# Altium PCB LKS_DEMO_V5.0.PcbDoc (part 2 of 4)
Units mil, origin at the board's own origin, x right, y up, seen from the top; angles counter-clockwise.
Board outline 5414.8 x 3354.56 mil, 2 copper layers (Top Layer, Bottom Layer); 131 components, 85 nets, 355 pads, 272 vias.
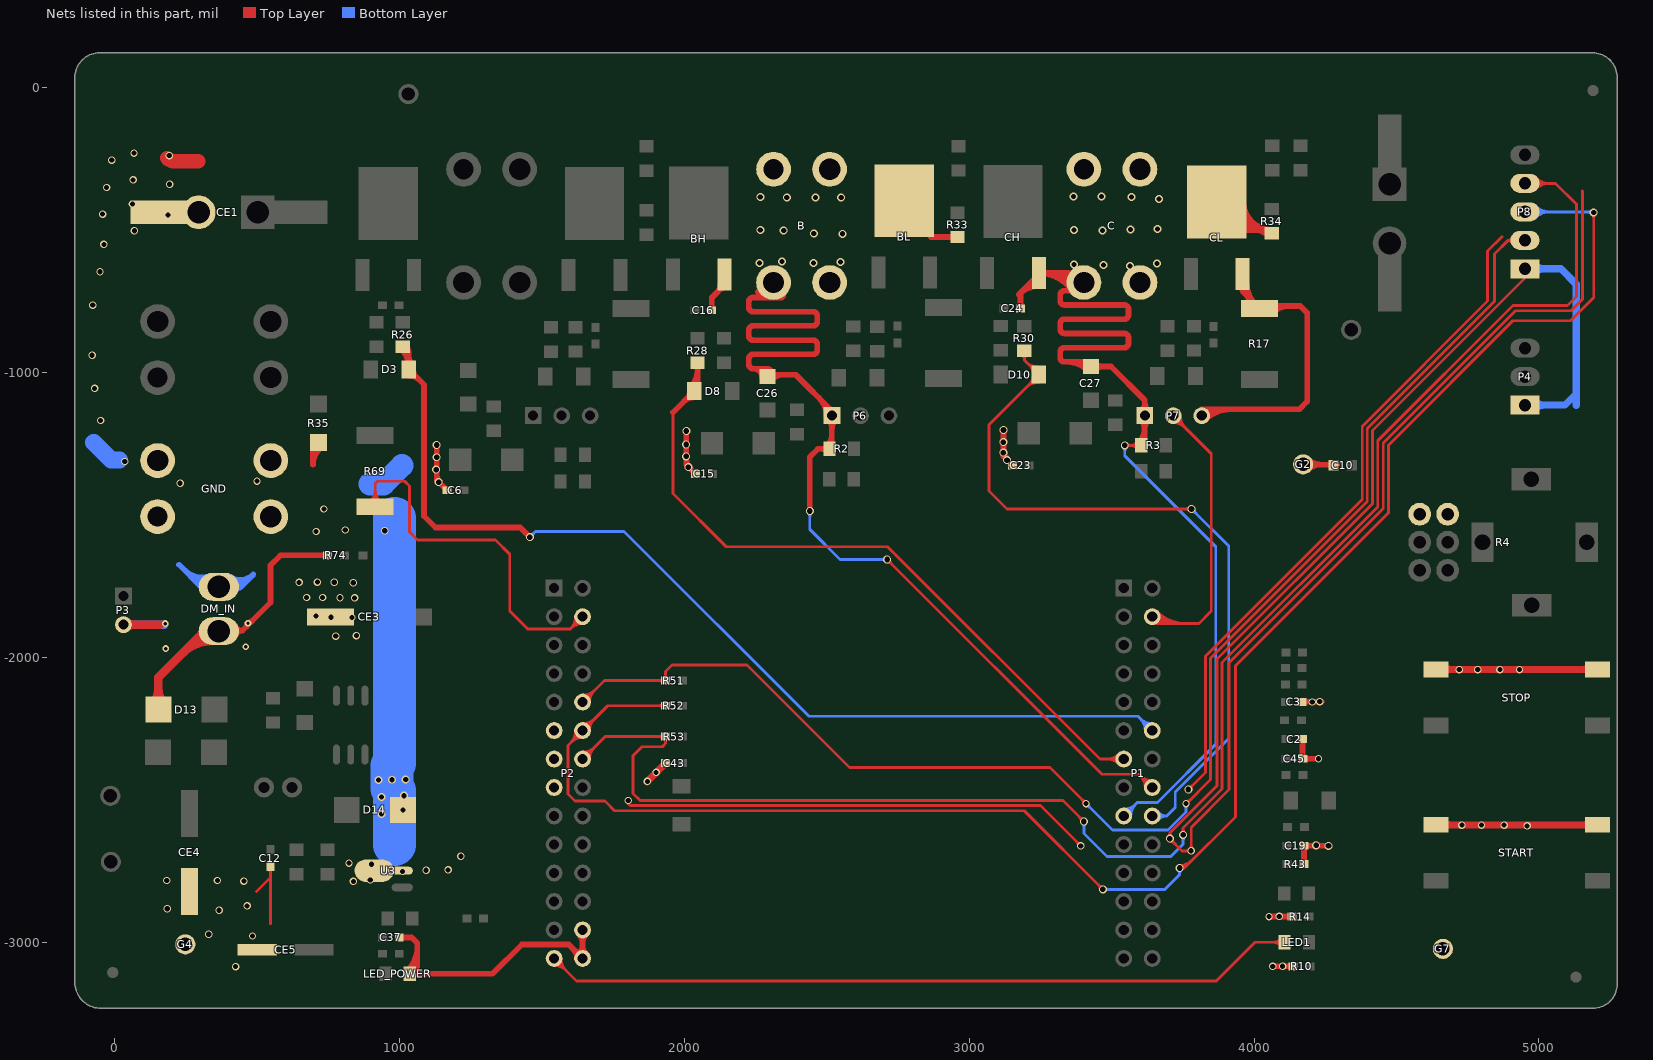
[diagram p2: the nets of this part, all layers, seen from the top]

## Via types
v1: diameter 26, hole 18, Top Layer to Bottom Layer, 117 vias
v2: diameter 28, hole 20, Top Layer to Bottom Layer, 77 vias
v3: diameter 28, hole 18, Top Layer to Bottom Layer, 73 vias
v4: diameter 23.62, hole 11.81, Top Layer to Bottom Layer, 5 vias

## Nets (pads, with @x,y where several pads share a name; then routed paths per layer and width w, separated by ;. In a path a pad name is that pad's centre, name@x,y a point inside that pad or via, vN(x,y) a via of type N, cw(c..) or ccw(c..) an arc to the next point about the centre after c; other vN are vias at no path point) (continued)
BX: B.1 BH.3 BL.2 C16.2 C26.2 P1.22 P6.1 R2.2 R33.2 | length 5651.7
  Top Layer w10: v2(2711.53,-1656.28) 3465.28,-2410.04 3595.47,-2410.04 P1.22@3642.25,-2456.82 ; 2726.89,-1671.64 ccw(c2711.53,-1687.01) 2711.53,-1665.28 cw(c2711.53,-1687.01) 2726.89,-1671.64 ; 2726.89,-1671.64 cw(c2742.25,-1656.28) 2720.53,-1656.28 ccw(c2742.25,-1656.28) 2726.89,-1671.64 ; 3600.38,-2414.94 ccw(c3642.25,-2373.07) 3642.25,-2432.29 cw(c3642.25,-2373.07) 3600.38,-2414.94 ; 3600.38,-2414.94 cw(c3558.51,-2456.82) 3617.72,-2456.82 ccw(c3558.51,-2456.82) 3600.38,-2414.94 ; 3617.45,-2432.02 ccw(c3642.25,-2407.22) 3642.25,-2442.29 cw(c3642.25,-2407.22) 3617.45,-2432.02 ; 3617.45,-2432.02 cw(c3592.65,-2456.82) 3627.72,-2456.82 ccw(c3592.65,-2456.82) 3617.45,-2432.02
  Top Layer w20: C16.2@2095.76,-779.93 2095.76,-737.17 BH.3@2142.44,-690.49 ; 2256.72,-716.82 2275.97,-736.07 ; C26.2@2283.73,-1030.78 2306.96,-1007.55 2390.76,-1007.55 2517.75,-1134.54 P6.1@2517.75,-1146.43 ; C26.2@2292.27,-1001.77 2276.58,-986.07 2240.96,-986.07 ; B.1@2345.96,-729.82 cw(c2339.71,-729.82) 2339.71,-736.07 2275.97,-736.07 ; v2(2439.84,-1486.25) 2439.84,-1296.61 2468.64,-1267.81 R2.2@2509.31,-1267.81 ; R2.2@2517.24,-1252.66 P6.1@2517.24,-1145.92 ; BL.2@2818.05,-476.55 2865.7,-524.2 R33.2@2958.78,-524.2 ; 2240.96,-986.07 cw(c2240.96,-971.07) 2225.96,-971.07 2225.96,-951.07 cw(c2240.96,-951.07) 2240.96,-936.07 2450.96,-936.07 ccw(c2450.96,-921.07) 2465.96,-921.07 2465.96,-901.07 ccw(c2450.96,-901.07) 2450.96,-886.07 2240.96,-886.07 cw(c2240.96,-871.07) 2225.96,-871.07 2225.96,-851.07 cw(c2240.96,-851.07) 2240.96,-836.07 2450.96,-836.07 ccw(c2450.96,-821.07) 2465.96,-821.07 2465.96,-801.07 ccw(c2450.96,-801.07) 2450.96,-786.07 2240.96,-786.07 cw(c2240.96,-771.07) 2225.96,-771.07 2225.96,-751.07 cw(c2240.96,-751.07) 2240.96,-736.07 2275.97,-736.07 ; 2240.96,-986.07 cw(c2240.96,-1018.55) 2273.27,-1015.24 ccw(c2240.96,-1018.55) 2240.96,-986.07 ; 2481.18,-1267.81 ccw(c2481.18,-1239.68) 2501.07,-1259.57 cw(c2481.18,-1239.68) 2481.18,-1267.81 ; 2481.18,-1267.81 cw(c2481.18,-1295.95) 2501.07,-1276.05 ccw(c2481.18,-1295.95) 2481.18,-1267.81 ; 2927.3,-524.2 ccw(c2927.3,-496.07) 2947.2,-515.96 cw(c2927.3,-496.07) 2927.3,-524.2 ; 2927.3,-524.2 cw(c2927.3,-552.33) 2947.2,-532.44 ccw(c2927.3,-552.33) 2927.3,-524.2 ; 2112.38,-720.55 ccw(c2079.48,-687.65) 2126.01,-687.65 cw(c2079.48,-687.65) 2112.38,-720.55 ; BH.3@2123.65,-709.29 cw(c2140.62,-726.26) 2140.62,-702.26 ccw(c2140.62,-726.26) BH.3@2123.65,-709.29 ; 2263.12,-986.07 cw(c2263.12,-1016.28) 2293.17,-1013.2 ccw(c2263.12,-1016.28) 2263.12,-986.07 ; 2285.27,-986.07 cw(c2285.27,-1014.01) 2313.06,-1011.16 ccw(c2285.27,-1014.01) 2285.27,-986.07 ; C26.2@2305.42,-1025.27 cw(c2348.2,-1068.06) 2348.2,-1007.55 ccw(c2348.2,-1068.06) C26.2@2305.42,-1025.27 ; 2472.61,-1089.39 cw(c2410.76,-1151.24) 2498.22,-1151.24 ccw(c2410.76,-1151.24) 2472.61,-1089.39 ; R2.2@2501.07,-1256.23 ccw(c2462.03,-1217.19) 2517.24,-1217.19 cw(c2462.03,-1217.19) R2.2@2501.07,-1256.23 ; P6.1@2503.94,-1165.05 cw(c2471.83,-1197.16) 2517.24,-1197.16 ccw(c2471.83,-1197.16) P6.1@2503.94,-1165.05 ; P6.1@2506.75,-1123.54 cw(c2479.05,-1151.24) 2518.22,-1151.24 ccw(c2479.05,-1151.24) P6.1@2506.75,-1123.54 ; 2517.24,-1199.61 cw(c2566.12,-1199.61) 2531.56,-1165.05 ccw(c2566.12,-1199.61) 2517.24,-1199.61
  Top Layer w30: BL.2@2771.14,-396.91 BL.2@2843.26,-324.79
  Bottom Layer w10: v2(2439.84,-1486.25) 2439.84,-1549.97 2546.15,-1656.28 v2(2711.53,-1656.28) ; 2439.84,-1507.98 ccw(c2418.11,-1507.98) 2433.48,-1492.61 cw(c2418.11,-1507.98) 2439.84,-1507.98 ; 2439.84,-1507.98 cw(c2461.57,-1507.98) 2446.2,-1492.61 ccw(c2461.57,-1507.98) 2439.84,-1507.98 ; 2689.8,-1656.28 ccw(c2689.8,-1634.55) 2705.16,-1649.92 cw(c2689.8,-1634.55) 2689.8,-1656.28 ; 2689.8,-1656.28 cw(c2689.8,-1678.01) 2705.16,-1662.64 ccw(c2689.8,-1678.01) 2689.8,-1656.28
  other v3: 2453.04,-615.74 2262.77,-614.91 2548.36,-611.49 2341.84,-609.97 2554.35,-512.78 2453.86,-511.13 2348.43,-501.25 2266.06,-499.6 2359.14,-385.93 2459.63,-385.11 2550.23,-385.11 2266.06,-383.46
CI: CL.3 P7.3 R17.1 | length 1960.4
  Top Layer w20: P7.3@3816.05,-1129.25 4158.12,-1129.25 4185.85,-1101.52 4185.85,-790.19 4161.78,-766.12 R17.1@4035,-766.12 ; CL.3@3959.59,-653.34 3959.59,-714.63 ; R17.1@4018.89,-773.93 3959.59,-714.63 ; CL.3@3950.65,-696.38 cw(c3936.51,-714.63) 3959.59,-714.63 ; CL.3@3950.65,-696.38 cw(c3936.51,-714.63) 3959.59,-714.63 ; CL.3@3950.65,-696.38 cw(c3936.51,-714.63) 3959.59,-714.63 ; CL.3@3950.65,-696.38 cw(c3936.51,-714.63) 3959.59,-714.63 ; 3959.59,-714.63 cw(c3982.67,-714.63) CL.3@3968.54,-696.38 ; 3959.59,-714.63 cw(c3982.67,-714.63) CL.3@3968.54,-696.38 ; 3959.59,-714.63 cw(c3982.67,-714.63) CL.3@3968.54,-696.38 ; 3959.59,-714.63 cw(c3982.67,-714.63) CL.3@3968.54,-696.38 ; P7.3@3815.72,-1150.9 cw(c3867.98,-1203.17) 3867.98,-1129.25 ccw(c3867.98,-1203.17) P7.3@3815.72,-1150.9 ; P7.3@3829.86,-1165.05 cw(c3916.27,-1251.46) 3916.27,-1129.25 ccw(c3916.27,-1251.46) P7.3@3829.86,-1165.05 ; CL.3@3954.2,-684.73 ccw(c4010.73,-685.8) 3970.75,-725.78 cw(c4010.73,-685.8) CL.3@3954.2,-684.73 ; 3968.31,-723.35 cw(c3927.85,-763.81) 3984.04,-774.61 ccw(c3927.85,-763.81) 3968.31,-723.35 ; CL.3@3974.2,-685.11 ccw(c4075.98,-687.04) 4003.99,-759.03 cw(c4075.98,-687.04) CL.3@3974.2,-685.11 ; R17.1@4068.26,-788.33 cw(c4121.87,-841.94) 4121.87,-766.12 ccw(c4121.87,-841.94) R17.1@4068.26,-788.33
CP: P1.16 P7.2 | length 2028.1
  Top Layer w10: P1.16@3642.25,-1856.82 3666.39,-1880.96 3806.07,-1880.96 3849.41,-1837.62 3849.41,-1284.87 3716.05,-1151.52 P7.2@3716.05,-1129.25 ; P1.16@3631.31,-1867.76 ccw(c3663.18,-1835.89) 3663.18,-1880.96 cw(c3663.18,-1835.89) P1.16@3631.31,-1867.76 ; P1.16@3638.38,-1860.69 ccw(c3687.32,-1811.75) 3687.32,-1880.96 cw(c3687.32,-1811.75) P1.16@3638.38,-1860.69 ; P1.16@3645.45,-1853.61 ccw(c3711.46,-1787.6) 3711.46,-1880.96 cw(c3711.46,-1787.6) P1.16@3645.45,-1853.61 ; P1.16@3652.52,-1846.54 ccw(c3735.6,-1763.46) 3735.6,-1880.96 cw(c3735.6,-1763.46) P1.16@3652.52,-1846.54 ; P1.16@3659.59,-1839.47 ccw(c3759.75,-1739.32) 3759.75,-1880.96 cw(c3759.75,-1739.32) P1.16@3659.59,-1839.47 ; P7.2@3716.05,-1175.77 cw(c3716.05,-1234.31) 3757.45,-1192.91 ccw(c3716.05,-1234.31) P7.2@3716.05,-1175.77 ; P7.2@3716.05,-1165.77 cw(c3716.05,-1200.16) 3740.37,-1175.84 ccw(c3716.05,-1200.16) P7.2@3716.05,-1165.77 ; P7.2@3730.58,-1151.24 ccw(c3766.32,-1151.24) 3741.05,-1176.51 cw(c3766.32,-1151.24) P7.2@3730.58,-1151.24 ; P7.2@3740.58,-1151.24 ccw(c3800.47,-1151.24) 3758.12,-1193.59 cw(c3800.47,-1151.24) P7.2@3740.58,-1151.24
CX: C24.2 C27.2 C.1 CH.3 CL.2 P1.9 P7.1 R3.2 R34.2 | length 7899.2
  Top Layer w10: v2@3545.76,-1255.52 R3.2@3603.88,-1255.52 ; 3563.68,-1255.52 ccw(c3563.68,-1215.31) 3592.11,-1243.74 cw(c3563.68,-1215.31) 3563.68,-1255.52 ; 3563.68,-1255.52 cw(c3563.68,-1295.72) 3592.11,-1267.29 ccw(c3563.68,-1295.72) 3563.68,-1255.52 ; v2@3552.04,-1261.8 cw(c3567.2,-1276.96) 3567.2,-1255.52 ccw(c3567.2,-1276.96) v2@3552.04,-1261.8 ; v2@3552.04,-1249.07 ccw(c3567.6,-1233.51) 3567.6,-1255.52 cw(c3567.6,-1233.51) v2@3552.04,-1249.07
  Top Layer w20: C24.2@3179.62,-774.76 3179.62,-719.71 CH.3@3244.29,-655.03 ; C.1@3407.81,-708.51 3350.03,-650.72 CH.3@3243.88,-650.72 ; C27.2@3427.06,-978.99 3497.71,-978.99 3616.05,-1097.32 P7.1@3616.05,-1151.24 ; C27.2@3431.28,-962.46 3334.05,-962.46 cw(c3334.05,-947.46) 3319.05,-947.46 3319.05,-927.46 cw(c3334.05,-927.46) 3334.05,-912.46 3544.05,-912.46 ccw(c3544.05,-897.46) 3559.05,-897.46 3559.05,-877.46 ccw(c3544.05,-877.46) 3544.05,-862.46 3334.05,-862.46 cw(c3334.05,-847.46) 3319.05,-847.46 3319.05,-827.46 cw(c3334.05,-827.46) 3334.05,-812.46 3544.05,-812.46 ccw(c3544.05,-797.46) 3559.05,-797.46 3559.05,-777.46 ccw(c3544.05,-777.46) 3544.05,-762.46 3334.05,-762.46 cw(c3334.05,-747.46) 3319.05,-747.46 3319.05,-727.46 cw(c3334.05,-727.46) 3334.05,-712.46 3430.58,-712.46 ccw(c3430.58,-704) C.1@3439.04,-704 ; R3.2@3614.91,-1254.73 P7.1@3614.91,-1128.61 ; CL.2@3869.04,-401.37 3967.82,-500.15 R34.2@4064.65,-500.15 ; CH.3@3243.88,-650.72 cw(c3243.89,-790.89) 3360,-712.38 ccw(c3243.89,-790.89) CH.3@3243.88,-650.72 ; 3279.14,-650.72 ccw(c3279.14,-685.99) 3254.21,-661.05 cw(c3279.14,-685.99) 3279.14,-650.72 ; 3279.14,-650.72 cw(c3279.14,-615.46) 3254.21,-640.4 ccw(c3279.14,-615.46) 3279.14,-650.72 ; 3469.04,-978.99 ccw(c3469.04,-1019) 3440.74,-990.71 cw(c3469.04,-1019) 3469.04,-978.99 ; 3469.04,-978.99 cw(c3469.04,-938.97) 3440.74,-967.27 ccw(c3469.04,-938.97) 3469.04,-978.99 ; 3616.05,-1104.09 ccw(c3663.19,-1104.09) 3629.86,-1137.43 cw(c3663.19,-1104.09) 3616.05,-1104.09 ; 3616.05,-1104.09 cw(c3568.91,-1104.09) 3602.24,-1137.43 ccw(c3568.91,-1104.09) 3616.05,-1104.09 ; R34.2@4064.64,-500.15 cw(c4064.64,-396.87) 3962.41,-411.57 ccw(c4064.64,-396.87) R34.2@4064.64,-500.15 ; 3173.24,-726.09 cw(c3243.88,-796.73) 3243.88,-696.83 ccw(c3243.88,-796.73) 3173.24,-726.09 ; 3207.38,-691.95 cw(c3243.88,-728.45) 3243.88,-676.83 ccw(c3243.88,-728.45) 3207.38,-691.95 ; CH.3@3241.52,-657.8 cw(c3243.88,-660.16) 3243.88,-656.83 ccw(c3243.88,-660.16) CH.3@3241.52,-657.8 ; 3281.56,-650.72 cw(c3281.56,-765.42) 3376.57,-701.17 ccw(c3281.56,-765.42) 3281.56,-650.72 ; 3319.22,-650.72 cw(c3319.22,-739.95) 3393.14,-689.97 ccw(c3319.22,-739.95) 3319.22,-650.72 ; 3345.18,-962.46 cw(c3345.18,-1058.9) 3413.37,-990.71 ccw(c3345.18,-1058.9) 3345.18,-962.46 ; 3348.3,-712.46 cw(c3348.3,-737.77) 3366.19,-719.87 ccw(c3348.3,-737.77) 3348.3,-712.46 ; 3393.46,-962.46 cw(c3393.46,-1010.61) 3427.51,-976.57 ccw(c3393.46,-1010.61) 3393.46,-962.46 ; R3.2@3595.64,-1243.93 ccw(c3549.14,-1197.43) 3614.91,-1197.43 cw(c3549.14,-1197.43) R3.2@3595.64,-1243.93 ; P7.1@3602.24,-1165.05 cw(c3571.67,-1195.62) 3614.91,-1195.62 ccw(c3571.67,-1195.62) P7.1@3602.24,-1165.05 ; 3614.91,-1201.15 cw(c3665.96,-1201.15) 3629.86,-1165.05 ccw(c3665.96,-1201.15) 3614.91,-1201.15 ; CL.2@3883.23,-422.95 ccw(c3972.32,-410.14) 3972.32,-500.15 cw(c3972.32,-410.14) CL.2@3883.23,-422.95 ; CL.2@3903.02,-420.1 ccw(c3995.4,-406.82) 3995.4,-500.15 cw(c3995.4,-406.82) CL.2@3903.02,-420.1 ; CL.2@3922.82,-417.26 ccw(c4018.48,-403.5) 4018.48,-500.15 cw(c4018.48,-403.5) CL.2@3922.82,-417.26 ; CL.2@3942.61,-414.41 ccw(c4041.56,-400.18) 4041.56,-500.15 cw(c4041.56,-400.18) CL.2@3942.61,-414.41 ; 4003.57,-500.15 cw(c4003.57,-566.15) 4050.23,-519.48 ccw(c4003.57,-566.15) 4003.57,-500.15
  Bottom Layer w10: P1.9@3542.25,-2556.82 3589.53,-2509.53 3660.12,-2509.53 3865.01,-2304.65 3865.01,-1611.21 3545.66,-1291.87 v2@3545.66,-1255.42 ; 3567.05,-2532.02 ccw(c3591.85,-2556.82) 3556.78,-2556.82 cw(c3591.85,-2556.82) 3567.05,-2532.02 ; 3567.05,-2532.02 cw(c3542.25,-2507.22) 3542.25,-2542.29 ccw(c3542.25,-2507.22) 3567.05,-2532.02 ; 3584.12,-2514.94 ccw(c3625.99,-2556.82) 3566.78,-2556.82 cw(c3625.99,-2556.82) 3584.12,-2514.94 ; 3584.12,-2514.94 cw(c3542.25,-2473.07) 3542.25,-2532.29 ccw(c3542.25,-2473.07) 3584.12,-2514.94 ; v2@3539.31,-1261.8 cw(c3523.97,-1277.14) 3545.66,-1277.14 ccw(c3523.97,-1277.14) v2@3539.31,-1261.8 ; 3545.66,-1277.18 cw(c3567.42,-1277.18) 3552.04,-1261.8 ccw(c3567.42,-1277.18) 3545.66,-1277.18
  other v2: 3545.67,-1255.43
  other v3: 3564.36,-625.82 3471.16,-622.37 3367.61,-620.65 3658.66,-616.83 3467.71,-501.56 3367.61,-499.84 3566.09,-498.11 3661.01,-496.39 3666.19,-391.11 3569.54,-384.21 3365.89,-382.48 3464.26,-382.48
DM_IN: D13.1 DM_IN.1 P3.2 R74.1 | length 2236.4
  Top Layer w20: DM_IN.1@316.98,-1905.81 447.95,-1905.81 ; R74.1@746.62,-1641.8 581.53,-1641.8 546.73,-1676.6 546.73,-1807.04 447.95,-1905.81 ; 447.95,-1905.81 ccw(c447.95,-1932.18) 423.45,-1922.44 cw(c447.95,-1932.18) 447.95,-1905.81 ; 447.95,-1905.81 cw(c447.95,-1876.37) 421.82,-1889.92 ccw(c447.95,-1876.37) 447.95,-1905.81 ; 460.08,-1893.69 ccw(c446.31,-1879.92) 465.78,-1879.92 cw(c446.31,-1879.92) 460.08,-1893.69 ; v4@467.59,-1878.11 ccw(c467.59,-1858.64) 481.36,-1872.41 cw(c467.59,-1858.64) v4@467.59,-1878.11
  Top Layer w30: P3.2@30.28,-1884.94 160,-1884.94 ; D13.1@153,-2182.97 153,-2069.8 DM_IN.1@316.98,-1905.81 ; 65.35,-1884.94 ccw(c65.35,-1920.01) 40.55,-1895.21 cw(c65.35,-1920.01) 65.35,-1884.94 ; 65.35,-1884.94 cw(c65.35,-1849.87) 40.55,-1874.67 ccw(c65.35,-1849.87) 65.35,-1884.94 ; 153,-2109.88 ccw(c226.09,-2109.88) 174.4,-2161.56 cw(c226.09,-2109.88) 153,-2109.88 ; 153,-2109.88 cw(c79.9,-2109.88) 131.59,-2161.56 ccw(c79.9,-2109.88) 153,-2109.88 ; 236,-1986.79 cw(c343.7,-2094.48) 343.7,-1942.18 ccw(c343.7,-2094.48) 236,-1986.79 ; 287.22,-1935.57 cw(c343.7,-1992.05) 343.7,-1912.18 ccw(c343.7,-1992.05) 287.22,-1935.57
  Bottom Layer w30: P3.2@30.28,-1884.94 v4@173.43,-1884.94 ; 65.35,-1884.94 ccw(c65.35,-1920.01) 40.55,-1895.21 cw(c65.35,-1920.01) 65.35,-1884.94 ; 65.35,-1884.94 cw(c65.35,-1849.87) 40.55,-1874.67 ccw(c65.35,-1849.87) 65.35,-1884.94
  other v4: 178.44,-1968.99 459.85,-1962.53 177.15,-1881.21 467.59,-1879.92
GND: C2.1 C3.2 C6.1 C10.2 C12.2 C15.1 C19.1 C23.1 C37.1 C43.1 C45.1 CE1.2 CE3.2 CE4.2 CE5.2 D14.1 DM_IN.2 G2.1 G4.1 G7.1 GND.1 LED_POWER.2 P2.16 P2.27 P2.28 P4.1 P8.1 R4.2 R4.4 R10.2 R14.2 R35.2 R43.1 R69.2 START.1 START.3 STOP.1 STOP.3 U3.2 | length 24932.8
  Top Layer w10: 497.13,-2822.29 546.38,-2773.05 ; 546.38,-2934.9 C12.2@546.38,-2734.12 ; R69.2@914.27,-1470.9 914.27,-1389.58 922.35,-1381.5 1017.63,-1381.5 1034.22,-1398.09 1034.22,-1558.82 1062.7,-1587.3 1336.01,-1587.3 1386.69,-1637.98 1386.69,-1836.74 1449.85,-1899.9 1599.17,-1899.9 P2.16@1642.25,-1856.82 ; v1(1802.37,-2502.34) 1802.37,-2513.52 1809.13,-2520.28 3249.96,-2520.28 v1@3391.58,-2661.9 ; v2(3768.98,-2463.96) 3829.09,-2403.83 3829.09,-1995.77 4379.28,-1445.58 4379.28,-1188.95 4819.78,-748.44 4819.78,-573.14 4870.02,-522.9 ; v1@3776.66,-2679.5 3746.72,-2679.5 v2(3703.71,-2636.48) 3703.7,-2616.34 ; v1@3779.38,-2682.22 3779.38,-2596.62 3911.8,-2464.2 3911.8,-2018.96 4453.19,-1477.57 4453.19,-1247.54 4917.92,-782.81 5112.33,-782.81 5152.47,-742.68 5152.47,-363.2 5151.94,-362.68 ; P8.1@4950.7,-635.64 4950.7,-668.08 4415.03,-1203.76 4415.03,-1460.39 3869.28,-2006.13 3869.28,-2450.75 3703.7,-2616.34 ; 546.38,-2757.28 ccw(c525.18,-2757.28) 540.17,-2742.29 cw(c525.18,-2757.28) 546.38,-2757.28 ; 546.38,-2757.28 cw(c567.57,-2757.28) 552.58,-2742.29 ccw(c567.57,-2757.28) 546.38,-2757.28 ; 914.27,-1435.82 ccw(c949.34,-1435.82) 924.54,-1460.62 cw(c949.34,-1435.82) 914.27,-1435.82 ; 914.27,-1435.82 cw(c879.2,-1435.82) 904,-1460.62 ccw(c879.2,-1435.82) 914.27,-1435.82 ; 914.27,-1411.68 ccw(c973.49,-1411.68) 931.61,-1453.55 cw(c973.49,-1411.68) 914.27,-1411.68 ; 914.27,-1411.68 cw(c855.06,-1411.68) 896.93,-1453.55 ccw(c855.06,-1411.68) 914.27,-1411.68 ; 1600.38,-1898.69 ccw(c1558.51,-1856.82) 1617.72,-1856.82 cw(c1558.51,-1856.82) 1600.38,-1898.69 ; 1600.38,-1898.69 cw(c1642.25,-1940.56) 1642.25,-1881.34 ccw(c1642.25,-1940.56) 1600.38,-1898.69 ; 1617.45,-1881.62 ccw(c1592.65,-1856.82) 1627.72,-1856.82 cw(c1592.65,-1856.82) 1617.45,-1881.62 ; 1617.45,-1881.62 cw(c1642.25,-1906.42) 1642.25,-1871.34 ccw(c1642.25,-1906.42) 1617.45,-1881.62 ; 3703.7,-2616.34 ccw(c3721.72,-2616.34) 3709.71,-2629.78 cw(c3721.72,-2616.34) 3703.7,-2616.34 ; 3703.7,-2616.34 cw(c3685.64,-2616.34) 3697.7,-2629.78 ccw(c3685.64,-2616.34) 3703.7,-2616.34 ; 3719.07,-2651.85 ccw(c3703.71,-2667.21) 3703.71,-2645.48 cw(c3703.71,-2667.21) 3719.07,-2651.85 ; 3719.07,-2651.85 cw(c3734.43,-2636.48) 3712.71,-2636.48 ccw(c3734.43,-2636.48) 3719.07,-2651.85 ; v1@3773.01,-2673.08 cw(c3757.51,-2657.58) 3757.51,-2679.5 ccw(c3757.51,-2657.58) v1@3773.01,-2673.08 ; v1@3773.01,-2673.08 ccw(c3757.64,-2657.71) 3779.38,-2657.71 cw(c3757.64,-2657.71) v1@3773.01,-2673.08 ; 3376.88,-2647.21 cw(c3362.19,-2661.9) 3382.97,-2661.9 ccw(c3362.19,-2661.9) 3376.88,-2647.21 ; 3378.36,-2648.68 ccw(c3390.97,-2636.06) 3390.97,-2653.9 cw(c3390.97,-2636.06) 3378.36,-2648.68 ; 3761.2,-2679.5 cw(c3761.2,-2696.21) 3773.01,-2684.39 ccw(c3761.2,-2696.21) 3761.2,-2679.5 ; v2@3768.98,-2454.96 ccw(c3768.98,-2433.27) 3784.32,-2448.6 cw(c3768.98,-2433.27) v2@3768.98,-2454.96 ; v2@3777.98,-2463.96 cw(c3799.75,-2463.96) 3784.36,-2448.56 ccw(c3799.75,-2463.96) v2@3777.98,-2463.96 ; 3779.38,-2661.14 ccw(c3796.27,-2661.14) 3784.33,-2673.08 cw(c3796.27,-2661.14) 3779.38,-2661.14
  Top Layer w20: 695.87,-1320.57 695.87,-1264.91 R35.2@715.63,-1245.14 ; C37.1@998.61,-2983.24 1042.18,-2983.24 1061.93,-3002.99 1061.93,-3084.89 LED_POWER.2@1036.01,-3110.82 1326.22,-3110.82 1429.02,-3008.01 1593.45,-3008.01 P2.28@1642.25,-3056.82 P2.27@1642.25,-2956.82 ; v2(1129.78,-1254.51) 1129.77,-1376.63 C6.1@1166.15,-1413.01 ; v2@2006.32,-1205.37 2006.32,-1322.72 C15.1@2039.42,-1355.82 ; v2(3120.2,-1201.76) 3120.19,-1294.77 C23.1@3151.34,-1325.92 ; v1(4052.23,-2909.82) R14.2@4132.95,-2909.82 ; v1(4065.25,-3084.6) R10.2@4136.85,-3084.6 ; C3.2@4168.4,-2156.04 v1@4236.85,-2156.04 ; C45.1@4170.04,-2355.01 C2.1@4170.04,-2286.71 ; C45.1@4170.76,-2355.72 v1(4225.95,-2355.72) ; G2.1@4171.95,-1322.36 4172.91,-1323.32 C10.2@4291.96,-1323.32 ; R43.1@4174.8,-2725.21 C19.1@4174.8,-2661.32 v2(4260.7,-2661.32) ; R35.2@715.63,-1245.14 ccw(c743.75,-1283.9) 695.87,-1283.9 cw(c743.75,-1283.9) R35.2@715.63,-1245.14 ; 1064.14,-3110.82 ccw(c1064.14,-3138.95) 1044.25,-3119.06 cw(c1064.14,-3138.95) 1064.14,-3110.82 ; 1064.14,-3110.82 cw(c1064.14,-3082.68) 1044.25,-3102.58 ccw(c1064.14,-3082.68) 1064.14,-3110.82 ; 1608.91,-3023.48 ccw(c1642.25,-2990.14) 1642.25,-3037.29 cw(c1642.25,-2990.14) 1608.91,-3023.48 ; 1608.91,-3023.48 cw(c1575.58,-3056.82) 1622.72,-3056.82 ccw(c1575.58,-3056.82) 1608.91,-3023.48 ; 1642.25,-3009.67 ccw(c1689.39,-3009.67) 1656.06,-3043.01 cw(c1689.39,-3009.67) 1642.25,-3009.67 ; 1642.25,-3009.67 cw(c1595.11,-3009.67) 1628.44,-3043.01 ccw(c1595.11,-3009.67) 1642.25,-3009.67 ; 1642.25,-3003.96 ccw(c1595.11,-3003.96) 1628.44,-2970.62 cw(c1595.11,-3003.96) 1642.25,-3003.96 ; 1642.25,-3003.96 cw(c1689.39,-3003.96) 1656.06,-2970.62 ccw(c1689.39,-3003.96) 1642.25,-3003.96 ; 695.87,-1323.12 cw(c772.21,-1323.12) 727.38,-1261.33 ccw(c772.21,-1323.12) 695.87,-1323.12 ; LED_POWER.2@1027.77,-3099.23 ccw(c945.28,-3016.75) 1061.93,-3016.75 cw(c945.28,-3016.75) LED_POWER.2@1027.77,-3099.23 ; LED_POWER.2@1036.01,-3095.82 ccw(c1036.01,-3059.61) 1061.62,-3085.21 cw(c1036.01,-3059.61) LED_POWER.2@1036.01,-3095.82 ; LED_POWER.2@1041.91,-3113.37 ccw(c993.57,-3065.03) 1061.93,-3065.03 cw(c993.57,-3065.03) LED_POWER.2@1041.91,-3113.37 ; LED_POWER.2@1047.66,-3107.47 cw(c1067.72,-3107.47) 1053.54,-3093.29 ccw(c1067.72,-3107.47) LED_POWER.2@1047.66,-3107.47 ; 1129.77,-1357.32 ccw(c1164.29,-1357.32) 1139.88,-1381.73 cw(c1164.29,-1357.32) 1129.77,-1357.32 ; v2@2006.32,-1305.48 ccw(c2039.73,-1305.48) 2016.1,-1329.11 cw(c2039.73,-1305.48) v2@2006.32,-1305.48 ; v2@3120.19,-1268.51 ccw(c3171.41,-1268.51) 3135.19,-1304.73 cw(c3171.41,-1268.51) v2@3120.19,-1268.51 ; v2@3123.43,-1281.22 ccw(c3163.96,-1281.22) 3135.3,-1309.88 cw(c3163.96,-1281.22) v2@3123.43,-1281.22 ; G2.1@4189.94,-1340.35 cw(c4231.04,-1381.45) 4231.04,-1323.32 ccw(c4231.04,-1381.45) G2.1@4189.94,-1340.35 ; G2.1@4189.94,-1304.38 ccw(c4235.67,-1258.65) 4235.67,-1323.32 cw(c4235.67,-1258.65) G2.1@4189.94,-1304.38 ; 4203.73,-2661.32 ccw(c4203.73,-2645.65) 4214.81,-2656.73 cw(c4203.73,-2645.65) 4203.73,-2661.32 ; v2@4220.47,-2656.73 ccw(c4231.55,-2645.65) 4231.55,-2661.32 cw(c4231.55,-2645.65) v2@4220.47,-2656.73 ; 4256.74,-1323.32 cw(c4256.74,-1346.44) 4273.09,-1330.1 ccw(c4256.74,-1346.44) 4256.74,-1323.32
  Top Layer w25: v1@1868.24,-2436.71 C43.1@1933.69,-2371.26 ; START.1@4617.02,-2588.57 4753.42,-2588.57 START.3@5183.94,-2588.58 ; STOP.1@4617.02,-2042.15 STOP.3@5183.95,-2042.15 ; v1@4720.17,-2042.15 STOP.3@5183.95,-2042.15 ; v1@4785.1,-2042.15 STOP.3@5183.95,-2042.15 ; v1@4798.13,-2588.58 START.3@5183.94,-2588.58 ; v1@4862.87,-2042.15 STOP.3@5183.95,-2042.15 ; v1@4877.34,-2588.58 START.3@5183.94,-2588.58 ; v1@4931.39,-2042.15 STOP.3@5183.95,-2042.15 ; v1@4958.33,-2588.58 START.3@5183.94,-2588.58 ; 5150.18,-2588.58 ccw(c5150.18,-2547.57) START.3@5179.17,-2576.57 ; 5150.18,-2588.58 ccw(c5150.18,-2547.57) START.3@5179.17,-2576.57 ; 5150.18,-2588.58 ccw(c5150.18,-2547.57) START.3@5179.17,-2576.57 ; 5150.18,-2588.58 ccw(c5150.18,-2547.57) START.3@5179.17,-2576.57 ; 5150.18,-2588.58 ccw(c5150.18,-2547.57) START.3@5179.17,-2576.57 ; 5150.18,-2588.58 ccw(c5150.18,-2547.57) START.3@5179.17,-2576.57 ; 5150.18,-2588.58 ccw(c5150.18,-2547.57) START.3@5179.17,-2576.57 ; 5150.18,-2588.58 ccw(c5150.18,-2547.57) START.3@5179.17,-2576.57 ; 5153.14,-2042.15 cw(c5153.14,-2078.97) STOP.3@5179.17,-2052.93 ; 5153.14,-2042.15 cw(c5153.14,-2078.97) STOP.3@5179.17,-2052.93 ; 5153.14,-2042.15 cw(c5153.14,-2078.97) STOP.3@5179.17,-2052.93 ; 5153.14,-2042.15 cw(c5153.14,-2078.97) STOP.3@5179.17,-2052.93 ; 5153.14,-2042.15 cw(c5153.14,-2078.97) STOP.3@5179.17,-2052.93 ; 5153.14,-2042.15 cw(c5153.14,-2078.97) STOP.3@5179.17,-2052.93 ; 5153.14,-2042.15 cw(c5153.14,-2078.97) STOP.3@5179.17,-2052.93 ; 5153.14,-2042.15 cw(c5153.14,-2078.97) STOP.3@5179.17,-2052.93 ; 5153.14,-2042.15 cw(c5153.14,-2078.97) STOP.3@5179.17,-2052.93 ; 5153.14,-2042.15 cw(c5153.14,-2078.97) STOP.3@5179.17,-2052.93 ; 5154,-2042.15 ccw(c5154,-2006.55) STOP.3@5179.17,-2031.72 ; 5154,-2042.15 ccw(c5154,-2006.55) STOP.3@5179.17,-2031.72 ; 5154,-2042.15 ccw(c5154,-2006.55) STOP.3@5179.17,-2031.72 ; 5154,-2042.15 ccw(c5154,-2006.55) STOP.3@5179.17,-2031.72 ; 5154,-2042.15 ccw(c5154,-2006.55) STOP.3@5179.17,-2031.72 ; 5154,-2042.15 ccw(c5154,-2006.55) STOP.3@5179.17,-2031.72 ; 5154,-2042.15 ccw(c5154,-2006.55) STOP.3@5179.17,-2031.72 ; 5154,-2042.15 ccw(c5154,-2006.55) STOP.3@5179.17,-2031.72 ; 5154,-2042.15 ccw(c5154,-2006.55) STOP.3@5179.17,-2031.72 ; 5154,-2042.15 ccw(c5154,-2006.55) STOP.3@5179.17,-2031.72 ; 5156.96,-2588.58 cw(c5156.96,-2620) START.3@5179.17,-2597.78 ; 5156.96,-2588.58 cw(c5156.96,-2620) START.3@5179.17,-2597.78 ; 5156.96,-2588.58 cw(c5156.96,-2620) START.3@5179.17,-2597.78 ; 5156.96,-2588.58 cw(c5156.96,-2620) START.3@5179.17,-2597.78 ; 5156.96,-2588.58 cw(c5156.96,-2620) START.3@5179.17,-2597.78 ; 5156.96,-2588.58 cw(c5156.96,-2620) START.3@5179.17,-2597.78 ; 5156.96,-2588.58 cw(c5156.96,-2620) START.3@5179.17,-2597.78 ; 5156.96,-2588.58 cw(c5156.96,-2620) START.3@5179.17,-2597.78 ; START.1@4665.07,-2597.78 cw(c4687.31,-2620.02) 4687.31,-2588.57 ccw(c4687.31,-2620.02) START.1@4665.07,-2597.78 ; START.1@4665.07,-2576.57 ccw(c4694.05,-2547.59) 4694.05,-2588.57 cw(c4694.05,-2547.59) START.1@4665.07,-2576.57 ; STOP.1@4665.07,-2052.93 cw(c4691.11,-2078.97) 4691.11,-2042.15 ccw(c4691.11,-2078.97) STOP.1@4665.07,-2052.93 ; STOP.1@4665.07,-2031.72 ccw(c4690.25,-2006.55) 4690.25,-2042.15 cw(c4690.25,-2006.55) STOP.1@4665.07,-2031.72
  Top Layer w50: 219.27,-258.2 292.97,-258.2 ; v1@182.84,-246.99 ccw(c209.92,-219.91) 209.92,-258.2 ; v1@182.84,-246.99 ccw(c209.92,-219.91) 209.92,-258.2 ; v1@182.84,-246.99 ccw(c209.92,-219.91) 209.92,-258.2 ; v1@182.84,-246.99 ccw(c209.92,-219.91) 209.92,-258.2
  Bottom Layer w20: 225.47,-1674.17 303.37,-1752.06 DM_IN.2@365.35,-1752.06 443.52,-1752.06 ; 486.46,-1708.31 486.46,-1709.13 ; 443.52,-1752.06 ccw(c443.52,-1773.18) 423.74,-1765.79 cw(c443.52,-1773.18) 443.52,-1752.06 ; 443.52,-1752.06 cw(c443.52,-1730.94) 423.74,-1738.34 ccw(c443.52,-1730.94) 443.52,-1752.06 ; 443.52,-1752.06 486.46,-1709.13 ; 486.45,-1709.13 cw(c440.92,-1663.6) 407.41,-1718.58 ccw(c440.92,-1663.6) 486.45,-1709.13 ; 245.64,-1694.33 ccw(c305.2,-1634.77) 331.47,-1714.81 cw(c305.2,-1634.77) 245.64,-1694.33 ; 268.64,-1717.33 ccw(c316.57,-1669.41) 337.71,-1733.81 cw(c316.57,-1669.41) 268.64,-1717.33 ; 291.64,-1740.34 ccw(c327.94,-1704.04) 343.94,-1752.81 cw(c327.94,-1704.04) 291.64,-1740.34 ; DM_IN.2@386.59,-1752.73 ccw(c413.68,-1708.29) 450.49,-1745.1 cw(c413.68,-1708.29) DM_IN.2@386.59,-1752.73 ; DM_IN.2@397,-1735.66 ccw(c427.3,-1685.95) 468.47,-1727.11 cw(c427.3,-1685.95) DM_IN.2@397,-1735.66
  Bottom Layer w25: P8.1@4950.7,-635.64 5076.7,-635.64 5130.71,-689.65 5130.71,-1116 ; P4.1@4950.98,-1114.16 5091.22,-1114.16 5129.77,-1075.61 ; 5019.03,-635.64 ccw(c5019.03,-686.25) 4983.24,-650.46 cw(c5019.03,-686.25) 5019.03,-635.64 ; 5019.03,-635.64 cw(c5019.03,-585.03) 4983.24,-620.81 ccw(c5019.03,-585.03) 5019.03,-635.64 ; 5019.31,-1114.16 ccw(c5019.31,-1164.77) 4983.52,-1128.98 cw(c5019.31,-1164.77) 5019.31,-1114.16 ; 5019.31,-1114.16 cw(c5019.31,-1063.55) 4983.52,-1099.34 ccw(c5019.31,-1063.55) 5019.31,-1114.16
  Bottom Layer w60: -74.04,-1245.5 -12.52,-1307.02 16.56,-1307.02
  Bottom Layer w80: 896.26,-1390.9 942.86,-1390.9 1007.94,-1325.82
  Bottom Layer w150: 973.1,-2380.58 973.1,-2459.15 982.12,-2468.17 982.12,-2657.27 ; 982.12,-2371.57 982.12,-1511.05
  other v1: 424.25,-3085.42 4099.94,-3084.46 483.5,-2977.96 329.85,-2971.94 4088.19,-2909.35 366,-2887.59 184.24,-2882.56 464.42,-2872.52 837.75,-2786.45 453.37,-2785.16 182.24,-2783.16 359.98,-2783.15 896.63,-2780.84 1010.18,-2751.4 1092.9,-2747.2 1170,-2745.8 900.83,-2726.17 822.33,-2721.97 1214.86,-2698.13 3778.67,-2678.74 3390.97,-2661.9 4958.33,-2591.38 4729.02,-2588.72 4798.13,-2588.72 4877.34,-2588.72 1869.87,-2435.22 1900.23,-2403.68 4204.03,-2156.43 4230.14,-2155.35 4720.17,-2043.04 4785.1,-2043.04 4862.87,-2043.03 4931.39,-2043.04 775.87,-1925.26 847.94,-1923.47 832.28,-1859.91 758.86,-1859.02 706.04,-1854.99 842.13,-1790.98 790.66,-1790.52 673.35,-1789.64 729.77,-1789.63 837.2,-1737.7 646.96,-1736.37 770.5,-1735.91 710.97,-1735.47 706.7,-1557.82 947.56,-1555.31 808.85,-1552.82 734.1,-1478.9 229.1,-1388.38 499.04,-1380.88 35.06,-1312.15 -49.76,-1168.18 -70.96,-1055.46 -79.9,-939.39 -77.66,-763.06 -51.99,-645.88 -38.6,-549.9 68.54,-501.9 186.85,-447.22 -43.06,-443.87 61.85,-408.16 -28.55,-350.12 192.43,-338.95 64.08,-323.34 -10.69,-254.14 191.33,-238.5 67.43,-229.59
  other v2: 4217.64,-2659.56 1137.05,-1384.56 1128.08,-1340.93 2013.27,-1331.94 3132.36,-1307.56 1130.11,-1297.3 2005.83,-1293.87 3119.43,-1281.22 2006.1,-1252.77 3119.42,-1244.25 2006.33,-1205.38
  other v3: 936.33,-2549.72 1011.33,-2535.22 936.33,-2490.22 1014.7,-2485.58 925.11,-2429.8 973.1,-2429.45 1021.33,-2428.4
HA: P2.21 P8.4 R53.1 | length 6877.8
  Top Layer w10: P2.21@1642.88,-2357.31 1722,-2278.19 R53.1@1933.69,-2278.19 1933.69,-2301.94 1921.83,-2313.79 1850.92,-2313.79 1819.65,-2345.06 1819.65,-2477.4 1844.66,-2502.4 3328.72,-2502.4 v2@3402.28,-2575.96 ; v2(3750.64,-2622.69) 3750.64,-2598.63 3887.15,-2462.12 3887.15,-2018.33 4433.99,-1471.49 4433.99,-1239.49 4908.54,-764.94 5100.14,-764.94 5131.81,-733.27 5131.81,-409.29 5058.15,-335.64 P8.4@4950.7,-335.64 ; 1910.53,-2278.19 ccw(c1910.53,-2257) 1925.52,-2271.98 cw(c1910.53,-2257) 1910.53,-2278.19 ; 1910.53,-2278.19 cw(c1910.53,-2299.39) 1925.52,-2284.4 ccw(c1910.53,-2299.39) 1910.53,-2278.19 ; 1933.69,-2299.39 ccw(c1912.5,-2299.39) 1927.48,-2284.4 cw(c1912.5,-2299.39) 1933.69,-2299.39 ; 1933.69,-2299.39 cw(c1954.89,-2299.39) 1939.9,-2284.4 ccw(c1954.89,-2299.39) 1933.69,-2299.39 ; 3750.64,-2600.96 ccw(c3772.37,-2600.96) 3757.01,-2616.32 cw(c3772.37,-2600.96) 3750.64,-2600.96 ; 3750.64,-2600.96 cw(c3728.91,-2600.96) 3744.28,-2616.32 ccw(c3728.91,-2600.96) 3750.64,-2600.96 ; 5012.99,-335.64 ccw(c5012.99,-380.22) 4981.47,-348.7 cw(c5012.99,-380.22) 5012.99,-335.64 ; 5012.99,-335.64 cw(c5012.99,-291.06) 4981.47,-322.58 ccw(c5012.99,-291.06) 5012.99,-335.64 ; 5037.13,-335.64 ccw(c5037.13,-404.36) 4988.54,-355.77 cw(c5037.13,-404.36) 5037.13,-335.64 ; 5037.13,-335.64 cw(c5037.13,-266.92) 4988.54,-315.51 ccw(c5037.13,-266.92) 5037.13,-335.64 ; P2.21@1642.25,-2342.29 ccw(c1642.25,-2304.5) 1668.97,-2331.22 cw(c1642.25,-2304.5) P2.21@1642.25,-2342.29 ; P2.21@1642.25,-2332.29 ccw(c1642.25,-2270.36) 1686.04,-2314.15 cw(c1642.25,-2270.36) P2.21@1642.25,-2332.29 ; P2.21@1656.78,-2356.82 cw(c1689.14,-2356.82) 1666.25,-2333.93 ccw(c1689.14,-2356.82) P2.21@1656.78,-2356.82 ; P2.21@1666.78,-2356.82 cw(c1723.28,-2356.82) 1683.33,-2316.86 ccw(c1723.28,-2356.82) P2.21@1666.78,-2356.82 ; 3386.43,-2560.12 cw(c3370.4,-2576.16) 3393.08,-2576.16 ccw(c3370.4,-2576.16) 3386.43,-2560.12 ; 3387.39,-2561.08 ccw(c3402.08,-2546.39) 3402.08,-2567.16 cw(c3402.08,-2546.39) 3387.39,-2561.08
  Bottom Layer w10: v2(3402.08,-2576.16) 3402.08,-2617.93 3483.37,-2699.22 3707.16,-2699.22 3750.64,-2655.74 v2(3750.64,-2622.69) ; 3402.08,-2597.89 ccw(c3380.35,-2597.89) 3395.71,-2582.52 cw(c3380.35,-2597.89) 3402.08,-2597.89 ; 3402.08,-2597.89 cw(c3423.81,-2597.89) 3408.44,-2582.52 ccw(c3423.81,-2597.89) 3402.08,-2597.89 ; 3750.64,-2644.41 ccw(c3728.91,-2644.41) 3744.28,-2629.05 cw(c3728.91,-2644.41) 3750.64,-2644.41 ; 3750.64,-2644.41 cw(c3772.37,-2644.41) 3757.01,-2629.05 ccw(c3772.37,-2644.41) 3750.64,-2644.41
HALL_A: P2.8
HALL_B: P2.7
HALL_C: P2.6
HB: P2.20 P8.3 R52.1 | length 7723.8
  Top Layer w10: R52.1@1933.48,-2169.52 1730.67,-2169.52 1591.38,-2308.8 1591.38,-2479.81 1615.84,-2504.26 1720.52,-2504.26 1754.41,-2538.15 3192.92,-2538.15 v2@3469.48,-2814.71 ; v2(3738.49,-2739.3) 3754.7,-2739.3 ; v3(5192.03,-437.58) 5192.03,-736.64 5110.74,-817.93 4908.07,-817.93 4471.07,-1254.94 4471.07,-1492.01 3933.93,-2029.14 3933.93,-2560.07 3754.7,-2739.3 ; 1910.32,-2169.52 ccw(c1910.32,-2148.32) 1925.31,-2163.31 cw(c1910.32,-2148.32) 1910.32,-2169.52 ; 1910.32,-2169.52 cw(c1910.32,-2190.71) 1925.31,-2175.73 ccw(c1910.32,-2190.71) 1910.32,-2169.52 ; 3754.7,-2739.3 ccw(c3754.7,-2749.4) 3746.13,-2744.06 cw(c3754.7,-2749.4) 3754.7,-2739.3 ; 3754.7,-2739.3 cw(c3754.7,-2729.19) 3746.13,-2734.54 ccw(c3754.7,-2729.19) 3754.7,-2739.3 ; 5192.03,-459.31 ccw(c5170.31,-459.31) 5185.67,-443.94 cw(c5170.31,-459.31) 5192.03,-459.31 ; 5192.03,-459.31 cw(c5213.76,-459.31) 5198.4,-443.94 ccw(c5213.76,-459.31) 5192.03,-459.31 ; 1599.58,-2300.61 ccw(c1555.79,-2256.82) 1617.72,-2256.82 cw(c1555.79,-2256.82) 1599.58,-2300.61 ; 1602.3,-2297.89 cw(c1642.25,-2337.84) 1642.25,-2281.34 ccw(c1642.25,-2337.84) 1602.3,-2297.89 ; 1616.65,-2283.53 ccw(c1589.94,-2256.82) 1627.72,-2256.82 cw(c1589.94,-2256.82) 1616.65,-2283.53 ; 1619.37,-2280.82 cw(c1642.25,-2303.7) 1642.25,-2271.34 ccw(c1642.25,-2303.7) 1619.37,-2280.82 ; P2.20@1642.25,-2242.29 ccw(c1642.25,-2204.5) 1668.97,-2231.22 cw(c1642.25,-2204.5) P2.20@1642.25,-2242.29 ; P2.20@1642.25,-2232.29 ccw(c1642.25,-2170.36) 1686.04,-2214.15 cw(c1642.25,-2170.36) P2.20@1642.25,-2232.29 ; P2.20@1656.78,-2256.82 cw(c1689.14,-2256.82) 1666.25,-2233.93 ccw(c1689.14,-2256.82) P2.20@1656.78,-2256.82 ; P2.20@1666.78,-2256.82 cw(c1723.28,-2256.82) 1683.33,-2216.86 ccw(c1723.28,-2256.82) P2.20@1666.78,-2256.82 ; 3452.67,-2797.91 cw(c3436.17,-2814.41) 3459.51,-2814.41 ccw(c3436.17,-2814.41) 3452.67,-2797.91 ; 3454.29,-2799.52 ccw(c3468.51,-2785.3) 3468.51,-2805.41 cw(c3468.51,-2785.3) 3454.29,-2799.52 ; v2@3738.49,-2740.3 ccw(c3738.49,-2703.57) 3764.46,-2729.54 cw(c3738.49,-2703.57) v2@3738.49,-2740.3 ; v2@3738.49,-2730.3 ccw(c3738.49,-2669.42) 3781.53,-2712.47 cw(c3738.49,-2669.42) v2@3738.49,-2730.3
  Bottom Layer w10: v2(3468.51,-2814.41) 3685.87,-2814.41 3738.48,-2761.81 v2(3738.49,-2739.3) ; P8.3@4950.7,-435.64 v3@5190.09,-435.64 ; 3490.24,-2814.41 ccw(c3490.24,-2836.14) 3474.87,-2820.78 cw(c3490.24,-2836.14) 3490.24,-2814.41 ; 3490.24,-2814.41 cw(c3490.24,-2792.69) 3474.87,-2808.05 ccw(c3490.24,-2792.69) 3490.24,-2814.41 ; 5012.99,-435.64 ccw(c5012.99,-480.22) 4981.47,-448.7 cw(c5012.99,-480.22) 5012.99,-435.64 ; 5012.99,-435.64 cw(c5012.99,-391.06) 4981.47,-422.58 ccw(c5012.99,-391.06) 5012.99,-435.64 ; 5037.13,-435.64 ccw(c5037.13,-504.36) 4988.54,-455.77 cw(c5037.13,-504.36) 5037.13,-435.64 ; 5037.13,-435.64 cw(c5037.13,-366.92) 4988.54,-415.51 ccw(c5037.13,-366.92) 5037.13,-435.64 ; v2@3732.13,-2745.66 cw(c3716.78,-2761) 3738.48,-2761 ccw(c3716.78,-2761) v2@3732.13,-2745.66 ; 3738.48,-2761.05 cw(c3760.24,-2761.05) 3744.85,-2745.66 ccw(c3760.24,-2761.05) 3738.48,-2761.05 ; 5165.62,-435.64 cw(c5165.62,-463.99) 5185.67,-443.94 ccw(c5165.62,-463.99) 5165.62,-435.64 ; 5174.99,-435.64 ccw(c5174.99,-420.53) 5185.67,-431.22 cw(c5174.99,-420.53) 5174.99,-435.64
HC: P2.19 P8.2 R51.1 | length 5736.2
  Top Layer w10: P2.19@1642.88,-2157.31 1718.82,-2081.37 R51.1@1933.22,-2081.37 1933.22,-2049.57 1955.97,-2026.81 2219.02,-2026.81 2578.91,-2386.71 3283.17,-2386.71 v1(3409.54,-2513.08) ; v1@3762.4,-2513.76 3846.96,-2429.2 3846.96,-2003.18 4397.15,-1452.98 4397.15,-1196.35 4844.18,-749.32 4844.18,-583.58 4892.12,-535.64 ; P8.2@4950.7,-535.64 4892.12,-535.64 ; 1910.05,-2081.37 ccw(c1910.05,-2060.17) 1925.04,-2075.16 cw(c1910.05,-2060.17) 1910.05,-2081.37 ; 1910.05,-2081.37 cw(c1910.05,-2102.57) 1925.04,-2087.58 ccw(c1910.05,-2102.57) 1910.05,-2081.37 ; 1933.22,-2060.17 ccw(c1954.41,-2060.17) 1939.43,-2075.16 cw(c1954.41,-2060.17) 1933.22,-2060.17 ; 1933.22,-2060.17 cw(c1912.02,-2060.17) 1927.01,-2075.16 ccw(c1912.02,-2060.17) 1933.22,-2060.17 ; 3395.89,-2499.42 ccw(c3409.54,-2485.76) 3409.54,-2505.08 cw(c3409.54,-2485.76) 3395.89,-2499.42 ; 3395.89,-2499.42 cw(c3382.23,-2513.08) 3401.54,-2513.08 ccw(c3382.23,-2513.08) 3395.89,-2499.42 ; 4892.12,-535.64 ccw(c4892.12,-520.55) 4906.28,-525.78 cw(c4892.12,-520.55) 4892.12,-535.64 ; 4892.12,-535.64 cw(c4892.12,-550.73) 4906.28,-545.5 ccw(c4892.12,-550.73) 4892.12,-535.64 ; P2.19@1642.25,-2142.29 ccw(c1642.25,-2104.5) 1668.97,-2131.22 cw(c1642.25,-2104.5) P2.19@1642.25,-2142.29 ; P2.19@1642.25,-2132.29 ccw(c1642.25,-2070.36) 1686.04,-2114.15 cw(c1642.25,-2070.36) P2.19@1642.25,-2132.29 ; P2.19@1656.78,-2156.82 cw(c1689.14,-2156.82) 1666.25,-2133.93 ccw(c1689.14,-2156.82) P2.19@1656.78,-2156.82 ; P2.19@1666.78,-2156.82 cw(c1723.28,-2156.82) 1683.33,-2116.86 ccw(c1723.28,-2156.82) P2.19@1666.78,-2156.82 ; v1@3760.57,-2505.09 ccw(c3760.57,-2479.73) 3778.5,-2497.66 cw(c3760.57,-2479.73) v1@3760.57,-2505.09 ; v1@3768.57,-2513.09 cw(c3781.85,-2513.09) 3772.46,-2503.7 ccw(c3781.85,-2513.09) v1@3768.57,-2513.09
  Bottom Layer w10: v1(3409.54,-2513.08) 3502.72,-2606.25 3697.61,-2606.25 3760.57,-2543.29 v1@3760.57,-2513.76 ; 3423.2,-2526.73 ccw(c3409.54,-2540.39) 3409.54,-2521.08 cw(c3409.54,-2540.39) 3423.2,-2526.73 ; 3423.2,-2526.73 cw(c3436.86,-2513.08) 3417.54,-2513.08 ccw(c3436.86,-2513.08) 3423.2,-2526.73 ; 3760.57,-2532.4 ccw(c3741.26,-2532.4) 3754.92,-2518.74 cw(c3741.26,-2532.4) 3760.57,-2532.4 ; 3760.57,-2532.4 cw(c3779.89,-2532.4) 3766.23,-2518.74 ccw(c3779.89,-2532.4) 3760.57,-2532.4
  other v1: 3760.57,-2513.09
HO1: D10.2 P1.23 R30.1 | length 3495.8
  Top Layer w10: R30.1@3192.94,-922.91 3192.94,-956.16 ; v2(3780.31,-1478.61) 3132.16,-1478.61 3068.76,-1415.21 3068.76,-1183.03 D10.2@3244.29,-1007.51 3192.94,-956.16 ; 3192.94,-956.16 ccw(c3168.07,-956.16) 3182.96,-936.24 cw(c3168.07,-956.16) 3192.94,-956.16 ; 3192.94,-956.16 cw(c3217.81,-956.16) 3202.91,-936.24 ccw(c3217.81,-956.16) 3192.94,-956.16 ; 3758.58,-1478.61 ccw(c3758.58,-1456.88) 3773.94,-1472.24 cw(c3758.58,-1456.88) 3758.58,-1478.61 ; 3758.58,-1478.61 cw(c3758.58,-1500.33) 3773.94,-1484.97 ccw(c3758.58,-1500.33) 3758.58,-1478.61 ; 3199.06,-1052.74 cw(c3244.29,-1097.97) 3244.29,-1034.01 ccw(c3244.29,-1097.97) 3199.06,-1052.74 ; 3199.06,-962.28 ccw(c3244.29,-917.05) 3244.29,-981.01 cw(c3244.29,-917.05) 3199.06,-962.28 ; 3213.31,-1038.48 ccw(c3188.24,-1013.42) 3223.7,-1013.42 cw(c3188.24,-1013.42) 3213.31,-1038.48 ; 3213.31,-976.54 cw(c3188.24,-1001.6) 3223.7,-1001.6 ccw(c3188.24,-1001.6) 3213.31,-976.54 ; 3216.13,-1035.67 cw(c3244.29,-1063.83) 3244.29,-1024.01 ccw(c3244.29,-1063.83) 3216.13,-1035.67 ; 3216.13,-979.35 ccw(c3244.29,-951.19) 3244.29,-991.01 cw(c3244.29,-951.19) 3216.13,-979.35
  Bottom Layer w10: P1.23@3642.25,-2556.82 3693.18,-2556.82 ; v2(3780.31,-1478.61) 3910.64,-1608.93 3910.64,-2284.3 3722.97,-2471.97 3722.97,-2527.02 3693.18,-2556.82 ; 3672.41,-2556.82 ccw(c3672.41,-2580.86) 3653.61,-2565.87 cw(c3672.41,-2580.86) 3672.41,-2556.82 ; 3672.41,-2556.82 cw(c3672.41,-2532.77) 3653.61,-2547.76 ccw(c3672.41,-2532.77) 3672.41,-2556.82 ; 3693.17,-2556.82 ccw(c3693.17,-2597.42) 3661.43,-2572.11 cw(c3693.17,-2597.42) 3693.17,-2556.82 ; 3693.17,-2556.82 cw(c3693.17,-2516.22) 3661.43,-2541.53 ccw(c3693.17,-2516.22) 3693.17,-2556.82 ; 3795.67,-1493.97 ccw(c3780.31,-1509.33) 3780.31,-1487.61 cw(c3780.31,-1509.33) 3795.67,-1493.97 ; 3795.67,-1493.97 cw(c3811.03,-1478.61) 3789.31,-1478.61 ccw(c3811.03,-1478.61) 3795.67,-1493.97
HO2: D8.2 P1.7 R28.1 | length 3074.3
  Top Layer w10: 1959.43,-1139.81 1959.43,-1424.09 2146.79,-1611.44 2713.02,-1611.44 3458.39,-2356.82 P1.7@3542.25,-2356.82 ; 3483.03,-2356.82 ccw(c3483.03,-2297.6) 3524.91,-2339.47 cw(c3483.03,-2297.6) 3483.03,-2356.82 ; 3483.03,-2356.82 cw(c3483.03,-2416.03) 3524.91,-2374.16 ccw(c3483.03,-2416.03) 3483.03,-2356.82 ; 3507.18,-2356.82 ccw(c3507.18,-2321.74) 3531.98,-2346.54 cw(c3507.18,-2321.74) 3507.18,-2356.82 ; 3507.18,-2356.82 cw(c3507.18,-2391.89) 3531.98,-2367.09 ccw(c3507.18,-2391.89) 3507.18,-2356.82
  Top Layer w20: 1959.43,-1139.81 D8.2@2033.81,-1065.43 ; D8.2@2046.11,-1053.13 R28.1@2046.11,-965.39 ; 2046.11,-993.52 ccw(c2017.97,-993.52) 2037.87,-973.63 cw(c2017.97,-993.52) 2046.11,-993.52 ; 2046.11,-993.52 cw(c2074.24,-993.52) 2054.35,-973.63 ccw(c2074.24,-993.52) 2046.11,-993.52 ; 1997.12,-1102.12 cw(c2033.81,-1138.82) 2033.81,-1086.92 ccw(c2033.81,-1138.82) 1997.12,-1102.12 ; D8.2@2011.37,-1087.87 ccw(c1994.84,-1071.33) 2018.22,-1071.33 cw(c1994.84,-1071.33) D8.2@2011.37,-1087.87 ; D8.2@2022.79,-1048.5 ccw(c1966.49,-992.2) 2046.11,-992.2 cw(c1966.49,-992.2) D8.2@2022.79,-1048.5
HO3: D3.2 P1.20 R26.1 | length 4393.7
  Top Layer w20: R26.1@1010.51,-909.43 1032.41,-931.33 D3.2@1032.41,-988.88 1085.78,-1042.24 1085.78,-1504.09 1125.9,-1544.22 1423.58,-1544.22 v2(1456.96,-1577.6) ; 1032.41,-945.33 ccw(c1070.05,-945.33) 1043.43,-971.95 cw(c1070.05,-945.33) 1032.41,-945.33 ; 1032.41,-945.33 cw(c994.77,-945.33) 1021.38,-971.95 ccw(c994.77,-945.33) 1032.41,-945.33 ; R26.1@1005.62,-917.67 cw(c940.95,-982.34) 1032.41,-982.34 ccw(c940.95,-982.34) R26.1@1005.62,-917.67 ; R26.1@1013.86,-921.09 cw(c1013.86,-941.14) 1028.04,-926.96 ccw(c1013.86,-941.14) R26.1@1013.86,-921.09 ; R26.1@1019.76,-903.53 cw(c989.24,-934.06) 1032.41,-934.06 ccw(c989.24,-934.06) R26.1@1019.76,-903.53 ; R26.1@1025.29,-911.71 ccw(c1044.79,-915.59) 1030.73,-929.65 cw(c1044.79,-915.59) R26.1@1025.29,-911.71 ; D3.2@1032.41,-1010.37 cw(c1032.41,-1062.27) 1069.1,-1025.57 ccw(c1032.41,-1062.27) D3.2@1032.41,-1010.37 ; D3.2@1048,-994.78 ccw(c1071.38,-994.78) 1054.85,-1011.31 cw(c1071.38,-994.78) D3.2@1048,-994.78
  Bottom Layer w10: v2(1456.96,-1577.6) 1477.1,-1557.47 1788.12,-1557.47 2437,-2206.35 3591.78,-2206.35 P1.20@3642.25,-2256.82 ; 1472.33,-1562.24 ccw(c1487.69,-1577.6) 1465.96,-1577.6 cw(c1487.69,-1577.6) 1472.33,-1562.24 ; 1472.33,-1562.24 cw(c1456.96,-1546.88) 1456.96,-1568.6 ccw(c1456.96,-1546.88) 1472.33,-1562.24 ; 3600.38,-2214.94 ccw(c3642.25,-2173.07) 3642.25,-2232.29 cw(c3642.25,-2173.07) 3600.38,-2214.94 ; 3600.38,-2214.94 cw(c3558.51,-2256.82) 3617.72,-2256.82 ccw(c3558.51,-2256.82) 3600.38,-2214.94 ; 3617.45,-2232.02 ccw(c3642.25,-2207.22) 3642.25,-2242.29 cw(c3642.25,-2207.22) 3617.45,-2232.02 ; 3617.45,-2232.02 cw(c3592.65,-2256.82) 3627.72,-2256.82 ccw(c3592.65,-2256.82) 3617.45,-2232.02
LED1: LED1.1 P2.14 | length 3076
  Top Layer w10: P2.14@1542.25,-3056.82 1621.34,-3135.91 3866.88,-3135.91 4002.57,-3000.22 LED1.1@4106.77,-3000.22 ; 1567.05,-3081.62 ccw(c1542.25,-3106.42) 1542.25,-3071.34 cw(c1542.25,-3106.42) 1567.05,-3081.62 ; 1567.05,-3081.62 cw(c1591.85,-3056.82) 1556.78,-3056.82 ccw(c1591.85,-3056.82) 1567.05,-3081.62 ; 1584.12,-3098.69 ccw(c1542.25,-3140.56) 1542.25,-3081.34 cw(c1542.25,-3140.56) 1584.12,-3098.69 ; 1584.12,-3098.69 cw(c1625.99,-3056.82) 1566.78,-3056.82 ccw(c1625.99,-3056.82) 1584.12,-3098.69 ; 4066.57,-3000.22 ccw(c4066.57,-2960.01) 4094.99,-2988.44 cw(c4066.57,-2960.01) 4066.57,-3000.22 ; 4066.57,-3000.22 cw(c4066.57,-3040.42) 4094.99,-3011.99 ccw(c4066.57,-3040.42) 4066.57,-3000.22